# EAGLE board gameboyzero (EAGLE 8.4.1)

Size 458.11 x 664.34 mm. Coordinates in mm from the lower left corner, seen from the top.
Outline: 39.79,313.34 arc-90 38.79,314.34 38.79,406.34 arc-90 39.79,407.34
Outline: 108.79,313.34 arc90 109.79,314.34
Outline: 109.79,406.34 arc90 108.79,407.34
Outline: 108.79,407.34 39.79,407.34
Outline: 38.79,445.34 38.79,450.34 arc-90 39.79,451.34 108.79,451.34 arc-90 109.79,450.34
Outline: 38.79,445.34 38.79,408.34 arc90 39.79,407.34
Outline: 108.79,407.34 arc90 109.79,408.34
Outline: 109.79,445.34 38.79,445.34
Outline: 39.79,219.34 arc-90 38.79,220.34 38.79,258.34 66.79,258.34 66.79,262.34 81.79,262.34 81.79,273.34 66.79,273.34 66.79,276.34 100.79,276.34 100.79,286.34 38.79,286.34 38.79,312.34 arc-90 39.79,313.34
Outline: 108.79,219.34 arc90 109.79,220.34
Outline: 109.79,312.34 109.79,305.34 104.79,305.34 104.79,286.34 109.79,286.34
Outline: 109.79,312.34 arc90 108.79,313.34
Outline: 108.79,313.34 39.79,313.34
Outline: 38.79,70.34 38.79,88.34 100.79,88.34 100.79,98.34 38.79,98.34 38.79,124.34 arc-90 39.79,125.34
Outline: 109.79,61.34 109.79,124.34
Outline: 109.79,124.34 arc90 108.79,125.34
Outline: 108.79,125.34 39.79,125.34
Outline: 38.79,70.34 101.79,70.34 101.79,61.34
Outline: 109.79,7.34 109.79,61.34
Outline: 38.79,70.34 38.79,7.34 arc90 39.79,6.34 108.79,6.34 arc90 109.79,7.34
Outline: 109.79,61.34 46.79,61.34 46.79,70.34
Outline: 39.79,125.34 arc-90 38.79,126.34 38.79,164.34 66.79,164.34 66.79,168.34 81.79,168.34 81.79,179.34 66.79,179.34 66.79,182.34 100.79,182.34 100.79,192.34 38.79,192.34 38.79,218.34 arc-90 39.79,219.34
Outline: 108.79,125.34 arc90 109.79,126.34
Outline: 109.79,126.34 109.79,218.34
Outline: 109.79,218.34 arc90 108.79,219.34
Outline: 108.79,219.34 39.79,219.34
Outline: 109.79,406.34 109.79,314.34
Outline: 109.79,450.34 109.79,445.34
Outline: 109.79,445.34 109.79,408.34
Outline: 109.79,286.34 109.79,220.34
Outline: 109.79,88.34 109.79,33.34
Outline: 109.79,406.34 109.79,314.34
Outline: 109.79,314.34 arc90 110.79,313.34
Outline: 179.79,313.34 arc90 180.79,314.34
Outline: 180.79,406.34 arc90 179.79,407.34
Outline: 179.79,407.34 110.79,407.34
Outline: 110.79,407.34 arc90 109.79,406.34
Outline: 109.79,450.34 109.79,445.34
Outline: 109.79,445.34 109.79,408.34
Outline: 109.79,408.34 arc90 110.79,407.34
Outline: 179.79,407.34 arc90 180.79,408.34
Outline: 180.79,450.34 arc90 179.79,451.34 110.79,451.34 arc90 109.79,450.34
Outline: 180.79,445.34 109.79,445.34
Outline: 109.79,312.34 109.79,286.34
Outline: 109.79,220.34 109.79,258.34 137.79,258.34 137.79,262.34 152.79,262.34 152.79,273.34 137.79,273.34 137.79,276.34 171.79,276.34 171.79,286.34 109.79,286.34
Outline: 109.79,220.34 arc90 110.79,219.34
Outline: 179.79,219.34 arc90 180.79,220.34
Outline: 180.79,312.34 180.79,305.34 175.79,305.34 175.79,286.34 180.79,286.34
Outline: 180.79,312.34 arc90 179.79,313.34
Outline: 110.79,313.34 arc90 109.79,312.34
Outline: 179.79,313.34 110.79,313.34
Outline: 109.79,124.34 109.79,98.34 171.79,98.34 171.79,88.34 109.79,88.34
Outline: 109.79,88.34 109.79,70.34
Outline: 180.79,61.34 180.79,124.34
Outline: 180.79,124.34 arc90 179.79,125.34
Outline: 179.79,125.34 110.79,125.34
Outline: 110.79,125.34 arc90 109.79,124.34
Outline: 109.79,70.34 172.79,70.34 172.79,61.34
Outline: 180.79,7.34 180.79,61.34
Outline: 109.79,70.34 109.79,7.34
Outline: 109.79,7.34 arc90 110.79,6.34 179.79,6.34 arc90 180.79,7.34
Outline: 180.79,61.34 117.79,61.34 117.79,70.34
Outline: 109.79,218.34 109.79,192.34 171.79,192.34 171.79,182.34 137.79,182.34 137.79,179.34 152.79,179.34 152.79,168.34 137.79,168.34 137.79,164.34 109.79,164.34 109.79,126.34
Outline: 109.79,126.34 arc90 110.79,125.34
Outline: 179.79,125.34 arc90 180.79,126.34
Outline: 180.79,126.34 180.79,218.34
Outline: 180.79,218.34 arc90 179.79,219.34
Outline: 110.79,219.34 arc90 109.79,218.34
Outline: 179.79,219.34 110.79,219.34
Outline: 180.79,406.34 180.79,314.34
Outline: 180.79,450.34 180.79,445.34
Outline: 180.79,445.34 180.79,408.34
Outline: 180.79,286.34 180.79,220.34
Outline: 180.79,88.34 180.79,33.34
Outline: 180.79,406.34 180.79,314.34
Outline: 180.79,314.34 arc90 181.79,313.34
Outline: 250.79,313.34 arc90 251.79,314.34
Outline: 251.79,406.34 arc90 250.79,407.34
Outline: 250.79,407.34 181.79,407.34
Outline: 181.79,407.34 arc90 180.79,406.34
Outline: 180.79,450.34 180.79,445.34
Outline: 180.79,445.34 180.79,408.34
Outline: 180.79,408.34 arc90 181.79,407.34
Outline: 250.79,407.34 arc90 251.79,408.34
Outline: 251.79,450.34 arc90 250.79,451.34 181.79,451.34 arc90 180.79,450.34
Outline: 251.79,445.34 180.79,445.34
Outline: 180.79,312.34 180.79,286.34
Outline: 180.79,220.34 180.79,258.34 208.79,258.34 208.79,262.34 223.79,262.34 223.79,273.34 208.79,273.34 208.79,276.34 242.79,276.34 242.79,286.34 180.79,286.34
Outline: 180.79,220.34 arc90 181.79,219.34
Outline: 250.79,219.34 arc90 251.79,220.34
Outline: 251.79,312.34 251.79,305.34 246.79,305.34 246.79,286.34 251.79,286.34
Outline: 251.79,312.34 arc90 250.79,313.34
Outline: 181.79,313.34 arc90 180.79,312.34
Outline: 250.79,313.34 181.79,313.34
Outline: 180.79,124.34 180.79,98.34 242.79,98.34 242.79,88.34 180.79,88.34
Outline: 180.79,88.34 180.79,70.34
Outline: 251.79,61.34 251.79,124.34
Outline: 251.79,124.34 arc90 250.79,125.34
Outline: 250.79,125.34 181.79,125.34
Outline: 181.79,125.34 arc90 180.79,124.34
Outline: 180.79,70.34 243.79,70.34 243.79,61.34
Outline: 251.79,7.34 251.79,61.34
Outline: 180.79,70.34 180.79,7.34
Outline: 180.79,7.34 arc90 181.79,6.34 250.79,6.34 arc90 251.79,7.34
Outline: 251.79,61.34 188.79,61.34 188.79,70.34
Outline: 180.79,218.34 180.79,192.34 242.79,192.34 242.79,182.34 208.79,182.34 208.79,179.34 223.79,179.34 223.79,168.34 208.79,168.34 208.79,164.34 180.79,164.34 180.79,126.34
Outline: 180.79,126.34 arc90 181.79,125.34
Outline: 250.79,125.34 arc90 251.79,126.34
Outline: 251.79,126.34 251.79,218.34
Outline: 251.79,218.34 arc90 250.79,219.34
Outline: 181.79,219.34 arc90 180.79,218.34
Outline: 250.79,219.34 181.79,219.34
Outline: 251.79,406.34 251.79,314.34
Outline: 251.79,450.34 251.79,445.34
Outline: 251.79,445.34 251.79,408.34
Outline: 251.79,286.34 251.79,220.34
Outline: 251.79,88.34 251.79,33.34
Outline: 251.79,406.34 251.79,314.34
Outline: 251.79,314.34 arc90 252.79,313.34
Outline: 321.79,313.34 arc90 322.79,314.34
Outline: 322.79,406.34 arc90 321.79,407.34
Outline: 321.79,407.34 252.79,407.34
Outline: 252.79,407.34 arc90 251.79,406.34
Outline: 251.79,450.34 251.79,445.34
Outline: 251.79,445.34 251.79,408.34
Outline: 251.79,408.34 arc90 252.79,407.34
Outline: 321.79,407.34 arc90 322.79,408.34
Outline: 322.79,450.34 arc90 321.79,451.34 252.79,451.34 arc90 251.79,450.34
Outline: 322.79,445.34 251.79,445.34
Outline: 251.79,312.34 251.79,286.34
Outline: 251.79,220.34 251.79,258.34 279.79,258.34 279.79,262.34 294.79,262.34 294.79,273.34 279.79,273.34 279.79,276.34 313.79,276.34 313.79,286.34 251.79,286.34
Outline: 251.79,220.34 arc90 252.79,219.34
Outline: 321.79,219.34 arc90 322.79,220.34
Outline: 322.79,312.34 322.79,305.34 317.79,305.34 317.79,286.34 322.79,286.34
Outline: 322.79,312.34 arc90 321.79,313.34
Outline: 252.79,313.34 arc90 251.79,312.34
Outline: 321.79,313.34 252.79,313.34
Outline: 251.79,124.34 251.79,98.34 313.79,98.34 313.79,88.34 251.79,88.34
Outline: 251.79,88.34 251.79,70.34
Outline: 322.79,61.34 322.79,124.34
Outline: 322.79,124.34 arc90 321.79,125.34
Outline: 321.79,125.34 252.79,125.34
Outline: 252.79,125.34 arc90 251.79,124.34
Outline: 251.79,70.34 314.79,70.34 314.79,61.34
Outline: 322.79,7.34 322.79,61.34
Outline: 251.79,70.34 251.79,7.34
Outline: 251.79,7.34 arc90 252.79,6.34 321.79,6.34 arc90 322.79,7.34
Outline: 322.79,61.34 259.79,61.34 259.79,70.34
Outline: 251.79,218.34 251.79,192.34 313.79,192.34 313.79,182.34 279.79,182.34 279.79,179.34 294.79,179.34 294.79,168.34 279.79,168.34 279.79,164.34 251.79,164.34 251.79,126.34
Outline: 251.79,126.34 arc90 252.79,125.34
Outline: 321.79,125.34 arc90 322.79,126.34
Outline: 322.79,126.34 322.79,218.34
Outline: 322.79,218.34 arc90 321.79,219.34
Outline: 252.79,219.34 arc90 251.79,218.34
Outline: 321.79,219.34 252.79,219.34
Outline: 322.79,406.34 322.79,314.34
Outline: 322.79,450.34 322.79,445.34
Outline: 322.79,445.34 322.79,408.34
Outline: 322.79,286.34 322.79,220.34
Outline: 322.79,88.34 322.79,33.34
Outline: 322.79,406.34 322.79,314.34
Outline: 322.79,314.34 arc90 323.79,313.34
Outline: 392.79,313.34 arc90 393.79,314.34 393.79,406.34 arc90 392.79,407.34
Outline: 392.79,407.34 323.79,407.34
Outline: 323.79,407.34 arc90 322.79,406.34
Outline: 322.79,450.34 322.79,445.34
Outline: 322.79,445.34 322.79,408.34
Outline: 322.79,408.34 arc90 323.79,407.34
Outline: 392.79,407.34 arc90 393.79,408.34 393.79,445.34
Outline: 322.79,450.34 arc-90 323.79,451.34 392.79,451.34 arc-90 393.79,450.34 393.79,445.34
Outline: 393.79,445.34 322.79,445.34
Outline: 322.79,312.34 322.79,286.34
Outline: 322.79,220.34 322.79,258.34 350.79,258.34 350.79,262.34 365.79,262.34 365.79,273.34 350.79,273.34 350.79,276.34 384.79,276.34 384.79,286.34 322.79,286.34
Outline: 322.79,220.34 arc90 323.79,219.34
Outline: 392.79,219.34 arc90 393.79,220.34 393.79,286.34 388.79,286.34 388.79,305.34 393.79,305.34 393.79,312.34 arc90 392.79,313.34
Outline: 323.79,313.34 arc90 322.79,312.34
Outline: 392.79,313.34 323.79,313.34
Outline: 322.79,124.34 322.79,98.34 384.79,98.34 384.79,88.34 322.79,88.34
Outline: 322.79,88.34 322.79,70.34
Outline: 393.79,61.34 393.79,124.34 arc90 392.79,125.34
Outline: 392.79,125.34 323.79,125.34
Outline: 323.79,125.34 arc90 322.79,124.34
Outline: 322.79,70.34 385.79,70.34 385.79,61.34
Outline: 393.79,61.34 393.79,7.34 arc-90 392.79,6.34 323.79,6.34 arc-90 322.79,7.34
Outline: 322.79,70.34 322.79,7.34
Outline: 393.79,61.34 330.79,61.34 330.79,70.34
Outline: 322.79,218.34 322.79,192.34 384.79,192.34 384.79,182.34 350.79,182.34 350.79,179.34 365.79,179.34 365.79,168.34 350.79,168.34 350.79,164.34 322.79,164.34 322.79,126.34
Outline: 322.79,126.34 arc90 323.79,125.34
Outline: 392.79,125.34 arc90 393.79,126.34 393.79,218.34 arc90 392.79,219.34
Outline: 323.79,219.34 arc90 322.79,218.34
Outline: 392.79,219.34 323.79,219.34
Outline: 393.79,88.34 393.79,33.34
Outline: 393.86,380.34 456.86,380.34
Outline: 456.86,380.34 arc90 457.86,381.34 457.86,450.34 arc90 456.86,451.34 402.86,451.34 402.86,388.34 393.86,388.34
Outline: 456.86,380.34 402.86,380.34 402.86,317.34 393.86,317.34
Outline: 393.86,309.34 456.86,309.34 arc90 457.86,310.34 457.86,379.34 arc90 456.86,380.34
Outline: 394.11,238.34 457.11,238.34 arc90 458.11,239.34 458.11,308.34 arc90 457.11,309.34 403.11,309.34 403.11,246.34 394.11,246.34
Outline: 394.09,167.26 457.09,167.26
Outline: 457.09,167.26 arc90 458.09,168.26 458.09,237.26 arc90 457.09,238.26 431.09,238.26 431.09,176.26 421.09,176.26 421.09,238.26 403.09,238.26 403.09,175.26 394.09,175.26
Outline: 457.09,167.26 431.09,167.26 431.09,105.26 421.09,105.26 421.09,167.26 403.09,167.26 403.09,104.26 394.09,104.26
Outline: 394.09,96.26 457.09,96.26
Outline: 457.09,96.26 arc90 458.09,97.26 458.09,166.26 arc90 457.09,167.26
Outline: 457.09,96.26 431.09,96.26 431.09,34.26 421.09,34.26 421.09,96.26 403.09,96.26 403.09,33.26 394.09,33.26
Outline: 394.09,25.26 457.09,25.26 arc90 458.09,26.26 458.09,95.26 arc90 457.09,96.26
Outline: 176.81,452.34 arc-90 175.81,451.34 83.81,451.34 arc-90 82.81,452.34
Outline: 176.81,521.34 arc90 175.81,522.34
Outline: 83.81,522.34 arc90 82.81,521.34
Outline: 82.81,521.34 82.81,452.34
Outline: 44.81,451.34 39.81,451.34 arc-90 38.81,452.34 38.81,521.34 arc-90 39.81,522.34
Outline: 44.81,451.34 81.81,451.34 arc90 82.81,452.34
Outline: 82.81,521.34 arc90 81.81,522.34
Outline: 44.81,522.34 44.81,451.34
Outline: 270.81,452.34 arc-90 269.81,451.34 231.81,451.34 231.81,479.34 227.81,479.34 227.81,494.34 216.81,494.34 216.81,479.34 213.81,479.34 213.81,513.34 203.81,513.34 203.81,451.34 177.81,451.34 arc-90 176.81,452.34
Outline: 270.81,521.34 arc90 269.81,522.34
Outline: 177.81,522.34 184.81,522.34 184.81,517.34 203.81,517.34 203.81,522.34
Outline: 177.81,522.34 arc90 176.81,521.34
Outline: 176.81,521.34 176.81,452.34
Outline: 363.81,522.34 arc-90 364.81,521.34 364.81,452.34 arc-90 363.81,451.34 325.81,451.34 325.81,479.34 321.81,479.34 321.81,494.34 310.81,494.34 310.81,479.34 307.81,479.34 307.81,513.34 297.81,513.34 297.81,451.34 271.81,451.34 arc-90 270.81,452.34
Outline: 363.81,522.34 271.81,522.34
Outline: 271.81,522.34 arc90 270.81,521.34
Outline: 270.81,521.34 270.81,452.34
Outline: 83.81,522.34 175.81,522.34
Outline: 39.81,522.34 44.81,522.34
Outline: 44.81,522.34 81.81,522.34
Outline: 203.81,522.34 269.81,522.34
Outline: 83.81,522.34 175.81,522.34
Outline: 175.81,522.34 arc90 176.81,523.34
Outline: 176.81,592.34 arc90 175.81,593.34
Outline: 83.81,593.34 arc90 82.81,592.34
Outline: 82.81,592.34 82.81,523.34
Outline: 82.81,523.34 arc90 83.81,522.34
Outline: 39.81,522.34 44.81,522.34
Outline: 44.81,522.34 81.81,522.34
Outline: 81.81,522.34 arc90 82.81,523.34
Outline: 82.81,592.34 arc90 81.81,593.34
Outline: 39.81,593.34 arc90 38.81,592.34 38.81,523.34 arc90 39.81,522.34
Outline: 44.81,593.34 44.81,522.34
Outline: 177.81,522.34 203.81,522.34
Outline: 269.81,522.34 231.81,522.34 231.81,550.34 227.81,550.34 227.81,565.34 216.81,565.34 216.81,550.34 213.81,550.34 213.81,584.34 203.81,584.34 203.81,522.34
Outline: 269.81,522.34 arc90 270.81,523.34
Outline: 270.81,592.34 arc90 269.81,593.34
Outline: 177.81,593.34 184.81,593.34 184.81,588.34 203.81,588.34 203.81,593.34
Outline: 177.81,593.34 arc90 176.81,592.34
Outline: 176.81,523.34 arc90 177.81,522.34
Outline: 176.81,592.34 176.81,523.34
Outline: 271.81,522.34 297.81,522.34 297.81,584.34 307.81,584.34 307.81,550.34 310.81,550.34 310.81,565.34 321.81,565.34 321.81,550.34 325.81,550.34 325.81,522.34 363.81,522.34
Outline: 363.81,522.34 arc90 364.81,523.34 364.81,592.34 arc90 363.81,593.34
Outline: 363.81,593.34 271.81,593.34
Outline: 271.81,593.34 arc90 270.81,592.34
Outline: 270.81,523.34 arc90 271.81,522.34
Outline: 270.81,592.34 270.81,523.34
Outline: 83.81,593.34 175.81,593.34
Outline: 39.81,593.34 44.81,593.34
Outline: 44.81,593.34 81.81,593.34
Outline: 203.81,593.34 269.81,593.34
Outline: 83.81,593.34 175.81,593.34
Outline: 175.81,593.34 arc90 176.81,594.34
Outline: 176.81,663.34 arc90 175.81,664.34 83.81,664.34 arc90 82.81,663.34
Outline: 82.81,663.34 82.81,594.34
Outline: 82.81,594.34 arc90 83.81,593.34
Outline: 39.81,593.34 44.81,593.34
Outline: 44.81,593.34 81.81,593.34
Outline: 81.81,593.34 arc90 82.81,594.34
Outline: 82.81,663.34 arc90 81.81,664.34 44.81,664.34
Outline: 39.81,593.34 arc-90 38.81,594.34 38.81,663.34 arc-90 39.81,664.34 44.81,664.34
Outline: 44.81,664.34 44.81,593.34
Outline: 177.81,593.34 203.81,593.34
Outline: 269.81,593.34 231.81,593.34 231.81,621.34 227.81,621.34 227.81,636.34 216.81,636.34 216.81,621.34 213.81,621.34 213.81,655.34 203.81,655.34 203.81,593.34
Outline: 269.81,593.34 arc90 270.81,594.34
Outline: 270.81,663.34 arc90 269.81,664.34 203.81,664.34 203.81,659.34 184.81,659.34 184.81,664.34 177.81,664.34 arc90 176.81,663.34
Outline: 176.81,594.34 arc90 177.81,593.34
Outline: 176.81,663.34 176.81,594.34
Outline: 271.81,593.34 297.81,593.34 297.81,655.34 307.81,655.34 307.81,621.34 310.81,621.34 310.81,636.34 321.81,636.34 321.81,621.34 325.81,621.34 325.81,593.34 363.81,593.34
Outline: 363.81,593.34 arc90 364.81,594.34 364.81,663.34 arc90 363.81,664.34 271.81,664.34 arc90 270.81,663.34
Outline: 270.81,594.34 arc90 271.81,593.34
Outline: 270.81,663.34 270.81,594.34
Outline: 0,25.4 0,0 25.4,0 25.4,25.4 0,25.4
Outline: 85.45,342.54 74.25,346.62 arc90 73.61,346.32 69.16,334.1 arc90 69.46,333.46 79.69,329.74 75.79,319.04 88.48,314.42 arc90 89.12,314.72 91.88,322.29 103.08,318.22 arc90 103.72,318.52 108.17,330.73 arc90 107.87,331.37 98.11,334.92 arc-90 97.81,335.56 101.37,345.33 arc90 101.07,345.97 88.85,350.42 arc90 88.21,350.12 85.45,342.54
Outline: 54.14,342.49 65.94,330.69 arc-90 65.94,329.99 54.14,318.19 arc-90 53.44,318.19 41.64,329.99 arc-90 41.64,330.69 53.44,342.49 arc-90 54.14,342.49
Outline: 44.79,348.84 44.79,344.84 arc90 45.29,344.34 62.29,344.34 arc90 62.79,344.84 62.79,348.84 arc90 62.29,349.34 45.29,349.34 arc90 44.79,348.84
Outline: 85.45,436.54 74.25,440.62 arc90 73.61,440.32 69.16,428.1 arc90 69.46,427.46 79.69,423.74 75.79,413.04 88.48,408.42 arc90 89.12,408.72 91.88,416.29 103.08,412.22 arc90 103.72,412.52 108.17,424.73 arc90 107.87,425.37 98.11,428.92 arc-90 97.81,429.56 101.37,439.33 arc90 101.07,439.97 88.85,444.42 arc90 88.21,444.12 85.45,436.54
Outline: 54.14,436.49 65.94,424.69 arc-90 65.94,423.99 54.14,412.19 arc-90 53.44,412.19 41.64,423.99 arc-90 41.64,424.69 53.44,436.49 arc-90 54.14,436.49
Outline: 44.79,442.84 44.79,438.84 arc90 45.29,438.34 62.29,438.34 arc90 62.79,438.84 62.79,442.84 arc90 62.29,443.34 45.29,443.34 arc90 44.79,442.84
Outline: 75.72,230.68 80.72,241.42 arc90 80.51,241.99 arc-90 80.27,242.66 86.71,256.46 arc-90 87.38,256.7 99.16,251.21 arc-90 99.4,250.55 93.48,237.85 arc90 93.72,237.18 arc-90 93.93,236.61 88.41,224.76 arc-90 87.74,224.52 75.96,230.02 arc-90 75.72,230.68
Outline: 72.62,230.02 60.84,224.52 arc-90 60.18,224.76 54.65,236.61 arc-90 54.86,237.18 arc90 55.1,237.85 49.18,250.55 arc-90 49.42,251.21 61.2,256.7 arc-90 61.87,256.46 68.31,242.66 arc-90 68.07,241.99 arc90 67.86,241.42 72.86,230.68 arc-90 72.62,230.02
Outline: 66.79,74.34 81.79,74.34 81.79,85.34 66.79,85.34 66.79,74.34
Outline: 75.72,136.68 80.72,147.42 arc90 80.51,147.99 arc-90 80.27,148.66 86.71,162.46 arc-90 87.38,162.71 99.16,157.21 arc-90 99.4,156.55 93.48,143.85 arc90 93.72,143.18 arc-90 93.93,142.61 88.41,130.76 arc-90 87.74,130.52 75.96,136.02 arc-90 75.72,136.68
Outline: 72.62,136.02 60.84,130.52 arc-90 60.18,130.76 54.65,142.61 arc-90 54.86,143.18 arc90 55.1,143.85 49.18,156.55 arc-90 49.42,157.21 61.2,162.71 arc-90 61.87,162.46 68.31,148.66 arc-90 68.07,147.99 arc90 67.86,147.42 72.86,136.68 arc-90 72.62,136.02
Outline: 156.45,342.54 145.25,346.62 arc90 144.61,346.32 140.16,334.1 arc90 140.46,333.46 150.69,329.74 146.79,319.04 159.48,314.42 arc90 160.12,314.72 162.88,322.29 174.08,318.22 arc90 174.72,318.52 179.17,330.73 arc90 178.87,331.37 169.11,334.92 arc-90 168.81,335.56 172.37,345.33 arc90 172.07,345.97 159.85,350.42 arc90 159.21,350.12 156.45,342.54
Outline: 125.14,342.49 136.94,330.69 arc-90 136.94,329.99 125.14,318.19 arc-90 124.44,318.19 112.64,329.99 arc-90 112.64,330.69 124.44,342.49 arc-90 125.14,342.49
Outline: 115.79,348.84 115.79,344.84 arc90 116.29,344.34 133.29,344.34 arc90 133.79,344.84 133.79,348.84 arc90 133.29,349.34 116.29,349.34 arc90 115.79,348.84
Outline: 156.45,436.54 145.25,440.62 arc90 144.61,440.32 140.16,428.1 arc90 140.46,427.46 150.69,423.74 146.79,413.04 159.48,408.42 arc90 160.12,408.72 162.88,416.29 174.08,412.22 arc90 174.72,412.52 179.17,424.73 arc90 178.87,425.37 169.11,428.92 arc-90 168.81,429.56 172.37,439.33 arc90 172.07,439.97 159.85,444.42 arc90 159.21,444.12 156.45,436.54
Outline: 125.14,436.49 136.94,424.69 arc-90 136.94,423.99 125.14,412.19 arc-90 124.44,412.19 112.64,423.99 arc-90 112.64,424.69 124.44,436.49 arc-90 125.14,436.49
Outline: 115.79,442.84 115.79,438.84 arc90 116.29,438.34 133.29,438.34 arc90 133.79,438.84 133.79,442.84 arc90 133.29,443.34 116.29,443.34 arc90 115.79,442.84
Outline: 146.72,230.68 151.72,241.42 arc90 151.51,241.99 arc-90 151.27,242.66 157.71,256.46 arc-90 158.38,256.7 170.16,251.21 arc-90 170.4,250.55 164.48,237.85 arc90 164.72,237.18 arc-90 164.93,236.61 159.41,224.76 arc-90 158.74,224.52 146.96,230.02 arc-90 146.72,230.68
Outline: 143.62,230.02 131.84,224.52 arc-90 131.18,224.76 125.65,236.61 arc-90 125.86,237.18 arc90 126.1,237.85 120.18,250.55 arc-90 120.42,251.21 132.2,256.7 arc-90 132.87,256.46 139.31,242.66 arc-90 139.07,241.99 arc90 138.86,241.42 143.86,230.68 arc-90 143.62,230.02
Outline: 137.79,74.34 152.79,74.34 152.79,85.34 137.79,85.34 137.79,74.34
Outline: 146.72,136.68 151.72,147.42 arc90 151.51,147.99 arc-90 151.27,148.66 157.71,162.46 arc-90 158.38,162.71 170.16,157.21 arc-90 170.4,156.55 164.48,143.85 arc90 164.72,143.18 arc-90 164.93,142.61 159.41,130.76 arc-90 158.74,130.52 146.96,136.02 arc-90 146.72,136.68
Outline: 143.62,136.02 131.84,130.52 arc-90 131.18,130.76 125.65,142.61 arc-90 125.86,143.18 arc90 126.1,143.85 120.18,156.55 arc-90 120.42,157.21 132.2,162.71 arc-90 132.87,162.46 139.31,148.66 arc-90 139.07,147.99 arc90 138.86,147.42 143.86,136.68 arc-90 143.62,136.02
Outline: 227.45,342.54 216.25,346.62 arc90 215.61,346.32 211.16,334.1 arc90 211.46,333.46 221.69,329.74 217.79,319.04 230.48,314.42 arc90 231.12,314.72 233.88,322.29 245.08,318.22 arc90 245.72,318.52 250.17,330.73 arc90 249.87,331.37 240.11,334.92 arc-90 239.81,335.56 243.37,345.33 arc90 243.07,345.97 230.85,350.42 arc90 230.21,350.12 227.45,342.54
Outline: 196.14,342.49 207.94,330.69 arc-90 207.94,329.99 196.14,318.19 arc-90 195.44,318.19 183.64,329.99 arc-90 183.64,330.69 195.44,342.49 arc-90 196.14,342.49
Outline: 186.79,348.84 186.79,344.84 arc90 187.29,344.34 204.29,344.34 arc90 204.79,344.84 204.79,348.84 arc90 204.29,349.34 187.29,349.34 arc90 186.79,348.84
Outline: 227.45,436.54 216.25,440.62 arc90 215.61,440.32 211.16,428.1 arc90 211.46,427.46 221.69,423.74 217.79,413.04 230.48,408.42 arc90 231.12,408.72 233.88,416.29 245.08,412.22 arc90 245.72,412.52 250.17,424.73 arc90 249.87,425.37 240.11,428.92 arc-90 239.81,429.56 243.37,439.33 arc90 243.07,439.97 230.85,444.42 arc90 230.21,444.12 227.45,436.54
Outline: 196.14,436.49 207.94,424.69 arc-90 207.94,423.99 196.14,412.19 arc-90 195.44,412.19 183.64,423.99 arc-90 183.64,424.69 195.44,436.49 arc-90 196.14,436.49
Outline: 186.79,442.84 186.79,438.84 arc90 187.29,438.34 204.29,438.34 arc90 204.79,438.84 204.79,442.84 arc90 204.29,443.34 187.29,443.34 arc90 186.79,442.84
Outline: 217.72,230.68 222.72,241.42 arc90 222.51,241.99 arc-90 222.27,242.66 228.71,256.46 arc-90 229.38,256.7 241.16,251.21 arc-90 241.4,250.55 235.48,237.85 arc90 235.72,237.18 arc-90 235.93,236.61 230.41,224.76 arc-90 229.74,224.52 217.96,230.02 arc-90 217.72,230.68
Outline: 214.62,230.02 202.84,224.52 arc-90 202.18,224.76 196.65,236.61 arc-90 196.86,237.18 arc90 197.1,237.85 191.18,250.55 arc-90 191.42,251.21 203.2,256.7 arc-90 203.87,256.46 210.31,242.66 arc-90 210.07,241.99 arc90 209.86,241.42 214.86,230.68 arc-90 214.62,230.02
Outline: 208.79,74.34 223.79,74.34 223.79,85.34 208.79,85.34 208.79,74.34
Outline: 217.72,136.68 222.72,147.42 arc90 222.51,147.99 arc-90 222.27,148.66 228.71,162.46 arc-90 229.38,162.71 241.16,157.21 arc-90 241.4,156.55 235.48,143.85 arc90 235.72,143.18 arc-90 235.93,142.61 230.41,130.76 arc-90 229.74,130.52 217.96,136.02 arc-90 217.72,136.68
Outline: 214.62,136.02 202.84,130.52 arc-90 202.18,130.76 196.65,142.61 arc-90 196.86,143.18 arc90 197.1,143.85 191.18,156.55 arc-90 191.42,157.21 203.2,162.71 arc-90 203.87,162.46 210.31,148.66 arc-90 210.07,147.99 arc90 209.86,147.42 214.86,136.68 arc-90 214.62,136.02
Outline: 298.45,342.54 287.25,346.62 arc90 286.61,346.32 282.16,334.1 arc90 282.46,333.46 292.69,329.74 288.79,319.04 301.48,314.42 arc90 302.12,314.72 304.88,322.29 316.08,318.22 arc90 316.72,318.52 321.16,330.73 arc90 320.87,331.37 311.11,334.92 arc-90 310.81,335.56 314.37,345.33 arc90 314.07,345.97 301.85,350.42 arc90 301.21,350.12 298.45,342.54
Outline: 267.14,342.49 278.94,330.69 arc-90 278.94,329.99 267.14,318.19 arc-90 266.44,318.19 254.64,329.99 arc-90 254.64,330.69 266.44,342.49 arc-90 267.14,342.49
Outline: 257.79,348.84 257.79,344.84 arc90 258.29,344.34 275.29,344.34 arc90 275.79,344.84 275.79,348.84 arc90 275.29,349.34 258.29,349.34 arc90 257.79,348.84
Outline: 298.45,436.54 287.25,440.62 arc90 286.61,440.32 282.16,428.1 arc90 282.46,427.46 292.69,423.74 288.79,413.04 301.48,408.42 arc90 302.12,408.72 304.88,416.29 316.08,412.22 arc90 316.72,412.52 321.16,424.73 arc90 320.87,425.37 311.11,428.92 arc-90 310.81,429.56 314.37,439.33 arc90 314.07,439.97 301.85,444.42 arc90 301.21,444.12 298.45,436.54
Outline: 267.14,436.49 278.94,424.69 arc-90 278.94,423.99 267.14,412.19 arc-90 266.44,412.19 254.64,423.99 arc-90 254.64,424.69 266.44,436.49 arc-90 267.14,436.49
Outline: 257.79,442.84 257.79,438.84 arc90 258.29,438.34 275.29,438.34 arc90 275.79,438.84 275.79,442.84 arc90 275.29,443.34 258.29,443.34 arc90 257.79,442.84
Outline: 288.72,230.68 293.72,241.42 arc90 293.51,241.99 arc-90 293.27,242.66 299.71,256.46 arc-90 300.38,256.7 312.16,251.21 arc-90 312.4,250.55 306.48,237.85 arc90 306.72,237.18 arc-90 306.93,236.61 301.4,224.76 arc-90 300.74,224.52 288.96,230.02 arc-90 288.72,230.68
Outline: 285.62,230.02 273.84,224.52 arc-90 273.18,224.76 267.65,236.61 arc-90 267.86,237.18 arc90 268.1,237.85 262.18,250.55 arc-90 262.42,251.21 274.2,256.7 arc-90 274.87,256.46 281.31,242.66 arc-90 281.07,241.99 arc90 280.86,241.42 285.86,230.68 arc-90 285.62,230.02
Outline: 279.79,74.34 294.79,74.34 294.79,85.34 279.79,85.34 279.79,74.34
Outline: 288.72,136.68 293.72,147.42 arc90 293.51,147.99 arc-90 293.27,148.66 299.71,162.46 arc-90 300.38,162.71 312.16,157.21 arc-90 312.4,156.55 306.48,143.85 arc90 306.72,143.18 arc-90 306.93,142.61 301.4,130.76 arc-90 300.74,130.52 288.96,136.02 arc-90 288.72,136.68
Outline: 285.62,136.02 273.84,130.52 arc-90 273.18,130.76 267.65,142.61 arc-90 267.86,143.18 arc90 268.1,143.85 262.18,156.55 arc-90 262.42,157.21 274.2,162.71 arc-90 274.87,162.46 281.31,148.66 arc-90 281.07,147.99 arc90 280.86,147.42 285.86,136.68 arc-90 285.62,136.02
Outline: 369.45,342.54 358.25,346.62 arc90 357.61,346.32 353.16,334.1 arc90 353.46,333.46 363.69,329.74 359.79,319.04 372.48,314.42 arc90 373.12,314.72 375.88,322.29 387.08,318.22 arc90 387.72,318.52 392.16,330.73 arc90 391.87,331.37 382.11,334.92 arc-90 381.81,335.56 385.37,345.33 arc90 385.07,345.97 372.85,350.42 arc90 372.21,350.12 369.45,342.54
Outline: 338.14,342.49 349.94,330.69 arc-90 349.94,329.99 338.14,318.19 arc-90 337.44,318.19 325.64,329.99 arc-90 325.64,330.69 337.44,342.49 arc-90 338.14,342.49
Outline: 328.79,348.84 328.79,344.84 arc90 329.29,344.34 346.29,344.34 arc90 346.79,344.84 346.79,348.84 arc90 346.29,349.34 329.29,349.34 arc90 328.79,348.84
Outline: 369.45,436.54 358.25,440.62 arc90 357.61,440.32 353.16,428.1 arc90 353.46,427.46 363.69,423.74 359.79,413.04 372.48,408.42 arc90 373.12,408.72 375.88,416.29 387.08,412.22 arc90 387.72,412.52 392.16,424.73 arc90 391.87,425.37 382.11,428.92 arc-90 381.81,429.56 385.37,439.33 arc90 385.07,439.97 372.85,444.42 arc90 372.21,444.12 369.45,436.54
Outline: 338.14,436.49 349.94,424.69 arc-90 349.94,423.99 338.14,412.19 arc-90 337.44,412.19 325.64,423.99 arc-90 325.64,424.69 337.44,436.49 arc-90 338.14,436.49
Outline: 328.79,442.84 328.79,438.84 arc90 329.29,438.34 346.29,438.34 arc90 346.79,438.84 346.79,442.84 arc90 346.29,443.34 329.29,443.34 arc90 328.79,442.84
Outline: 359.72,230.68 364.72,241.42 arc90 364.51,241.99 arc-90 364.27,242.66 370.71,256.46 arc-90 371.38,256.7 383.16,251.21 arc-90 383.4,250.55 377.48,237.85 arc90 377.72,237.18 arc-90 377.93,236.61 372.4,224.76 arc-90 371.74,224.52 359.96,230.02 arc-90 359.72,230.68
Outline: 356.62,230.02 344.84,224.52 arc-90 344.18,224.76 338.65,236.61 arc-90 338.86,237.18 arc90 339.1,237.85 333.18,250.55 arc-90 333.42,251.21 345.2,256.7 arc-90 345.87,256.46 352.31,242.66 arc-90 352.07,241.99 arc90 351.86,241.42 356.86,230.68 arc-90 356.62,230.02
Outline: 350.79,74.34 365.79,74.34 365.79,85.34 350.79,85.34 350.79,74.34
Outline: 359.72,136.68 364.72,147.42 arc90 364.51,147.99 arc-90 364.27,148.66 370.71,162.46 arc-90 371.38,162.71 383.16,157.21 arc-90 383.4,156.55 377.48,143.85 arc90 377.72,143.18 arc-90 377.93,142.61 372.4,130.76 arc-90 371.74,130.52 359.96,136.02 arc-90 359.72,136.68
Outline: 356.62,136.02 344.84,130.52 arc-90 344.18,130.76 338.65,142.61 arc-90 338.86,143.18 arc90 339.1,143.85 333.18,156.55 arc-90 333.42,157.21 345.2,162.71 arc-90 345.87,162.46 352.31,148.66 arc-90 352.07,147.99 arc90 351.86,147.42 356.86,136.68 arc-90 356.62,136.02
Outline: 407.09,210.26 407.09,195.26 418.09,195.26 418.09,210.26 407.09,210.26
Outline: 407.09,139.26 407.09,124.26 418.09,124.26 418.09,139.26 407.09,139.26
Outline: 407.09,68.26 407.09,53.26 418.09,53.26 418.09,68.26 407.09,68.26
Outline: 147.61,498 143.53,486.8 arc90 143.83,486.16 156.05,481.71 arc90 156.69,482.01 160.41,492.24 171.12,488.34 175.73,501.03 arc90 175.43,501.67 167.86,504.43 171.93,515.63 arc90 171.63,516.27 159.42,520.72 arc90 158.78,520.42 155.23,510.66 arc-90 154.59,510.36 144.82,513.91 arc90 144.18,513.62 139.73,501.4 arc90 140.03,500.76 147.61,498
Outline: 147.66,466.69 159.46,478.49 arc-90 160.16,478.49 171.96,466.69 arc-90 171.96,465.99 160.16,454.19 arc-90 159.46,454.19 147.66,465.99 arc-90 147.66,466.69
Outline: 141.31,457.34 145.31,457.34 arc90 145.81,457.84 145.81,474.84 arc90 145.31,475.34 141.31,475.34 arc90 140.81,474.84 140.81,457.84 arc90 141.31,457.34
Outline: 53.61,498 49.53,486.8 arc90 49.83,486.16 62.05,481.71 arc90 62.69,482.01 66.41,492.24 77.12,488.34 81.73,501.03 arc90 81.43,501.67 73.86,504.43 77.93,515.63 arc90 77.63,516.27 65.42,520.72 arc90 64.78,520.42 61.23,510.66 arc-90 60.59,510.36 50.82,513.91 arc90 50.18,513.62 45.73,501.4 arc90 46.03,500.76 53.61,498
Outline: 53.66,466.69 65.46,478.49 arc-90 66.16,478.49 77.96,466.69 arc-90 77.96,465.99 66.16,454.19 arc-90 65.46,454.19 53.66,465.99 arc-90 53.66,466.69
Outline: 47.31,457.34 51.31,457.34 arc90 51.81,457.84 51.81,474.84 arc90 51.31,475.34 47.31,475.34 arc90 46.81,474.84 46.81,457.84 arc90 47.31,457.34
Outline: 259.47,488.27 248.73,493.27 arc90 248.16,493.06 arc-90 247.49,492.82 233.69,499.26 arc-90 233.44,499.93 238.94,511.71 arc-90 239.6,511.95 252.3,506.03 arc90 252.97,506.27 arc-90 253.54,506.48 265.38,500.95 arc-90 265.63,500.29 260.13,488.51 arc-90 259.47,488.27
Outline: 260.13,485.17 265.63,473.39 arc-90 265.38,472.73 253.54,467.2 arc-90 252.97,467.41 arc90 252.3,467.65 239.6,461.73 arc-90 238.94,461.97 233.44,473.75 arc-90 233.69,474.42 247.49,480.86 arc-90 248.16,480.62 arc90 248.73,480.41 259.47,485.41 arc-90 260.13,485.17
Outline: 353.47,488.27 342.73,493.27 arc90 342.16,493.06 arc-90 341.49,492.82 327.69,499.26 arc-90 327.44,499.93 332.94,511.71 arc-90 333.6,511.95 346.3,506.03 arc90 346.97,506.27 arc-90 347.54,506.48 359.38,500.95 arc-90 359.63,500.29 354.13,488.51 arc-90 353.47,488.27
Outline: 354.13,485.17 359.63,473.39 arc-90 359.38,472.73 347.54,467.2 arc-90 346.97,467.41 arc90 346.3,467.65 333.6,461.73 arc-90 332.94,461.97 327.44,473.75 arc-90 327.69,474.42 341.49,480.86 arc-90 342.16,480.62 arc90 342.73,480.41 353.47,485.41 arc-90 354.13,485.17
Outline: 147.61,569 143.53,557.8 arc90 143.83,557.16 156.05,552.71 arc90 156.69,553.01 160.41,563.24 171.12,559.34 175.73,572.03 arc90 175.43,572.67 167.86,575.43 171.93,586.63 arc90 171.63,587.27 159.42,591.72 arc90 158.78,591.42 155.23,581.66 arc-90 154.59,581.36 144.82,584.91 arc90 144.18,584.62 139.73,572.4 arc90 140.03,571.76 147.61,569
Outline: 147.66,537.69 159.46,549.49 arc-90 160.16,549.49 171.96,537.69 arc-90 171.96,536.99 160.16,525.19 arc-90 159.46,525.19 147.66,536.99 arc-90 147.66,537.69
Outline: 141.31,528.34 145.31,528.34 arc90 145.81,528.84 145.81,545.84 arc90 145.31,546.34 141.31,546.34 arc90 140.81,545.84 140.81,528.84 arc90 141.31,528.34
Outline: 53.61,569 49.53,557.8 arc90 49.83,557.16 62.05,552.71 arc90 62.69,553.01 66.41,563.24 77.12,559.34 81.73,572.03 arc90 81.43,572.67 73.86,575.43 77.93,586.63 arc90 77.63,587.27 65.42,591.72 arc90 64.78,591.42 61.23,581.66 arc-90 60.59,581.36 50.82,584.91 arc90 50.18,584.62 45.73,572.4 arc90 46.03,571.76 53.61,569
Outline: 53.66,537.69 65.46,549.49 arc-90 66.16,549.49 77.96,537.69 arc-90 77.96,536.99 66.16,525.19 arc-90 65.46,525.19 53.66,536.99 arc-90 53.66,537.69
Outline: 47.31,528.34 51.31,528.34 arc90 51.81,528.84 51.81,545.84 arc90 51.31,546.34 47.31,546.34 arc90 46.81,545.84 46.81,528.84 arc90 47.31,528.34
Outline: 259.47,559.27 248.73,564.27 arc90 248.16,564.06 arc-90 247.49,563.82 233.69,570.26 arc-90 233.44,570.92 238.94,582.71 arc-90 239.6,582.95 252.3,577.03 arc90 252.97,577.27 arc-90 253.54,577.48 265.38,571.96 arc-90 265.63,571.29 260.13,559.51 arc-90 259.47,559.27
Outline: 260.13,556.17 265.63,544.39 arc-90 265.38,543.73 253.54,538.2 arc-90 252.97,538.41 arc90 252.3,538.65 239.6,532.73 arc-90 238.94,532.97 233.44,544.75 arc-90 233.69,545.42 247.49,551.86 arc-90 248.16,551.62 arc90 248.73,551.41 259.47,556.41 arc-90 260.13,556.17
Outline: 353.47,559.27 342.73,564.27 arc90 342.16,564.06 arc-90 341.49,563.82 327.69,570.26 arc-90 327.44,570.92 332.94,582.71 arc-90 333.6,582.95 346.3,577.03 arc90 346.97,577.27 arc-90 347.54,577.48 359.38,571.96 arc-90 359.63,571.29 354.13,559.51 arc-90 353.47,559.27
Outline: 354.13,556.17 359.63,544.39 arc-90 359.38,543.73 347.54,538.2 arc-90 346.97,538.41 arc90 346.3,538.65 333.6,532.73 arc-90 332.94,532.97 327.44,544.75 arc-90 327.69,545.42 341.49,551.86 arc-90 342.16,551.62 arc90 342.73,551.41 353.47,556.41 arc-90 354.13,556.17
Outline: 147.61,640 143.53,628.8 arc90 143.83,628.16 156.05,623.71 arc90 156.69,624.01 160.41,634.24 171.12,630.34 175.73,643.03 arc90 175.43,643.67 167.86,646.43 171.93,657.63 arc90 171.63,658.27 159.42,662.72 arc90 158.78,662.42 155.23,652.66 arc-90 154.59,652.36 144.82,655.91 arc90 144.18,655.62 139.73,643.4 arc90 140.03,642.76 147.61,640
Outline: 147.66,608.69 159.46,620.49 arc-90 160.16,620.49 171.96,608.69 arc-90 171.96,607.99 160.16,596.19 arc-90 159.46,596.19 147.66,607.99 arc-90 147.66,608.69
Outline: 141.31,599.34 145.31,599.34 arc90 145.81,599.84 145.81,616.84 arc90 145.31,617.34 141.31,617.34 arc90 140.81,616.84 140.81,599.84 arc90 141.31,599.34
Outline: 53.61,640 49.53,628.8 arc90 49.83,628.16 62.05,623.71 arc90 62.69,624.01 66.41,634.24 77.12,630.34 81.73,643.03 arc90 81.43,643.67 73.86,646.43 77.93,657.63 arc90 77.63,658.27 65.42,662.72 arc90 64.78,662.42 61.23,652.66 arc-90 60.59,652.36 50.82,655.91 arc90 50.18,655.62 45.73,643.4 arc90 46.03,642.76 53.61,640
Outline: 53.66,608.69 65.46,620.49 arc-90 66.16,620.49 77.96,608.69 arc-90 77.96,607.99 66.16,596.19 arc-90 65.46,596.19 53.66,607.99 arc-90 53.66,608.69
Outline: 47.31,599.34 51.31,599.34 arc90 51.81,599.84 51.81,616.84 arc90 51.31,617.34 47.31,617.34 arc90 46.81,616.84 46.81,599.84 arc90 47.31,599.34
Outline: 259.47,630.27 248.73,635.27 arc90 248.16,635.06 arc-90 247.49,634.82 233.69,641.26 arc-90 233.44,641.92 238.94,653.71 arc-90 239.6,653.95 252.3,648.03 arc90 252.97,648.27 arc-90 253.54,648.48 265.38,642.96 arc-90 265.63,642.29 260.13,630.51 arc-90 259.47,630.27
Outline: 260.13,627.17 265.63,615.39 arc-90 265.38,614.73 253.54,609.2 arc-90 252.97,609.41 arc90 252.3,609.65 239.6,603.73 arc-90 238.94,603.97 233.44,615.75 arc-90 233.69,616.42 247.49,622.86 arc-90 248.16,622.62 arc90 248.73,622.41 259.47,627.41 arc-90 260.13,627.17
Outline: 353.47,630.27 342.73,635.27 arc90 342.16,635.06 arc-90 341.49,634.82 327.69,641.26 arc-90 327.44,641.92 332.94,653.71 arc-90 333.6,653.95 346.3,648.03 arc90 346.97,648.27 arc-90 347.54,648.48 359.38,642.96 arc-90 359.63,642.29 354.13,630.51 arc-90 353.47,630.27
Outline: 354.13,627.17 359.63,615.39 arc-90 359.38,614.73 347.54,609.2 arc-90 346.97,609.41 arc90 346.3,609.65 333.6,603.73 arc-90 332.94,603.97 327.44,615.75 arc-90 327.69,616.42 341.49,622.86 arc-90 342.16,622.62 arc90 342.73,622.41 353.47,627.41 arc-90 354.13,627.17
Copper layers (1*16): Top 0.035mm / dielectric 1.5mm / Bottom 0.035mm
Design rules "default": minimum track width 6mil, minimum drill 0.35mm, track to track 6mil, track to pad 6mil, pad to pad 6mil, via to via 6mil, smd to smd 6mil, copper to edge 40mil, drill to drill 6mil, minimum pad ring 10mil, minimum via ring 8mil, stop-mask expansion 4mil, vias tented up to drill 0mil, thermal gap 10mil

## Footprints (pad centres in the part's own frame; a part is rotated, then mirrored left to right if it is on the bottom)
2,8 = hole 2.8: 0,0

## Placement (x,y rotation side)
H16  MOUNT-HOLE2.8  [2,8]  172.81,455.34 90 top
H17  MOUNT-HOLE2.8  [2,8]  172.81,518.34 90 top
H18  MOUNT-HOLE2.8  [2,8]  142.81,518.34 90 top
H19  MOUNT-HOLE2.8  [2,8]  85.81,455.34 90 top
H20  MOUNT-HOLE2.8  [2,8]  85.81,518.34 90 top
H21  MOUNT-HOLE2.8  [2,8]  78.81,455.34 90 top
H22  MOUNT-HOLE2.8  [2,8]  42.79,317.34 0 top
H23  MOUNT-HOLE2.8  [2,8]  105.79,317.34 0 top
H24  MOUNT-HOLE2.8  [2,8]  105.79,347.34 0 top
H25  MOUNT-HOLE2.8  [2,8]  42.79,404.34 0 top
H26  MOUNT-HOLE2.8  [2,8]  105.79,404.34 0 top
H32  MOUNT-HOLE2.8  [2,8]  42.79,411.34 0 top
H33  MOUNT-HOLE2.8  [2,8]  105.79,411.34 0 top
H34  MOUNT-HOLE2.8  [2,8]  105.79,441.34 0 top
H35  MOUNT-HOLE2.8  [2,8]  42.79,448.34 0 top
H36  MOUNT-HOLE2.8  [2,8]  105.79,448.34 0 top
H37  MOUNT-HOLE2.8  [2,8]  42.79,223.34 0 top
H38  MOUNT-HOLE2.8  [2,8]  105.79,223.34 0 top
H39  MOUNT-HOLE2.8  [2,8]  105.79,253.34 0 top
H40  MOUNT-HOLE2.8  [2,8]  42.79,310.34 0 top
H41  MOUNT-HOLE2.8  [2,8]  105.79,310.34 0 top
H42  MOUNT-HOLE2.8  [2,8]  105.79,65.34 0 top
H43  MOUNT-HOLE2.8  [2,8]  42.79,122.34 0 top
H44  MOUNT-HOLE2.8  [2,8]  105.79,122.34 0 top
H45  MOUNT-HOLE2.8  [2,8]  42.79,66.34 180 top
H46  MOUNT-HOLE2.8  [2,8]  105.79,9.34 180 top
H47  MOUNT-HOLE2.8  [2,8]  42.79,9.34 180 top
H48  MOUNT-HOLE2.8  [2,8]  42.79,129.34 0 top
H49  MOUNT-HOLE2.8  [2,8]  105.79,129.34 0 top
H50  MOUNT-HOLE2.8  [2,8]  105.79,159.34 0 top
H51  MOUNT-HOLE2.8  [2,8]  42.79,216.34 0 top
H52  MOUNT-HOLE2.8  [2,8]  105.79,216.34 0 top
H53  MOUNT-HOLE2.8  [2,8]  113.79,317.34 0 top
H54  MOUNT-HOLE2.8  [2,8]  176.79,317.34 0 top
H55  MOUNT-HOLE2.8  [2,8]  176.79,347.34 0 top
H56  MOUNT-HOLE2.8  [2,8]  113.79,404.34 0 top
H57  MOUNT-HOLE2.8  [2,8]  176.79,404.34 0 top
H58  MOUNT-HOLE2.8  [2,8]  113.79,411.34 0 top
H59  MOUNT-HOLE2.8  [2,8]  176.79,411.34 0 top
H60  MOUNT-HOLE2.8  [2,8]  176.79,441.34 0 top
H61  MOUNT-HOLE2.8  [2,8]  113.79,448.34 0 top
H62  MOUNT-HOLE2.8  [2,8]  176.79,448.34 0 top
H63  MOUNT-HOLE2.8  [2,8]  113.79,223.34 0 top
H64  MOUNT-HOLE2.8  [2,8]  176.79,223.34 0 top
H65  MOUNT-HOLE2.8  [2,8]  176.79,253.34 0 top
H66  MOUNT-HOLE2.8  [2,8]  113.79,310.34 0 top
H67  MOUNT-HOLE2.8  [2,8]  176.79,310.34 0 top
H68  MOUNT-HOLE2.8  [2,8]  176.79,65.34 0 top
H69  MOUNT-HOLE2.8  [2,8]  113.79,122.34 0 top
H70  MOUNT-HOLE2.8  [2,8]  176.79,122.34 0 top
H71  MOUNT-HOLE2.8  [2,8]  113.79,66.34 180 top
H72  MOUNT-HOLE2.8  [2,8]  176.79,9.34 180 top
H73  MOUNT-HOLE2.8  [2,8]  113.79,9.34 180 top
H74  MOUNT-HOLE2.8  [2,8]  113.79,129.34 0 top
H75  MOUNT-HOLE2.8  [2,8]  176.79,129.34 0 top
H76  MOUNT-HOLE2.8  [2,8]  176.79,159.34 0 top
H77  MOUNT-HOLE2.8  [2,8]  113.79,216.34 0 top
H78  MOUNT-HOLE2.8  [2,8]  176.79,216.34 0 top
H79  MOUNT-HOLE2.8  [2,8]  184.79,317.34 0 top
H80  MOUNT-HOLE2.8  [2,8]  247.79,317.34 0 top
H81  MOUNT-HOLE2.8  [2,8]  247.79,347.34 0 top
H82  MOUNT-HOLE2.8  [2,8]  184.79,404.34 0 top
H83  MOUNT-HOLE2.8  [2,8]  247.79,404.34 0 top
H84  MOUNT-HOLE2.8  [2,8]  184.79,411.34 0 top
H85  MOUNT-HOLE2.8  [2,8]  247.79,411.34 0 top
H86  MOUNT-HOLE2.8  [2,8]  247.79,441.34 0 top
H87  MOUNT-HOLE2.8  [2,8]  184.79,448.34 0 top
H88  MOUNT-HOLE2.8  [2,8]  247.79,448.34 0 top
H89  MOUNT-HOLE2.8  [2,8]  184.79,223.34 0 top
H90  MOUNT-HOLE2.8  [2,8]  247.79,223.34 0 top
H91  MOUNT-HOLE2.8  [2,8]  247.79,253.34 0 top
H92  MOUNT-HOLE2.8  [2,8]  184.79,310.34 0 top
H93  MOUNT-HOLE2.8  [2,8]  247.79,310.34 0 top
H94  MOUNT-HOLE2.8  [2,8]  247.79,65.34 0 top
H95  MOUNT-HOLE2.8  [2,8]  184.79,122.34 0 top
H96  MOUNT-HOLE2.8  [2,8]  247.79,122.34 0 top
H97  MOUNT-HOLE2.8  [2,8]  184.79,66.34 180 top
H98  MOUNT-HOLE2.8  [2,8]  247.79,9.34 180 top
H99  MOUNT-HOLE2.8  [2,8]  184.79,9.34 180 top
H100  MOUNT-HOLE2.8  [2,8]  184.79,129.34 0 top
H101  MOUNT-HOLE2.8  [2,8]  247.79,129.34 0 top
H102  MOUNT-HOLE2.8  [2,8]  247.79,159.34 0 top
H103  MOUNT-HOLE2.8  [2,8]  184.79,216.34 0 top
H104  MOUNT-HOLE2.8  [2,8]  247.79,216.34 0 top
H105  MOUNT-HOLE2.8  [2,8]  255.79,317.34 0 top
H106  MOUNT-HOLE2.8  [2,8]  318.79,317.34 0 top
H107  MOUNT-HOLE2.8  [2,8]  318.79,347.34 0 top
H108  MOUNT-HOLE2.8  [2,8]  255.79,404.34 0 top
H109  MOUNT-HOLE2.8  [2,8]  318.79,404.34 0 top
H110  MOUNT-HOLE2.8  [2,8]  255.79,411.34 0 top
H111  MOUNT-HOLE2.8  [2,8]  318.79,411.34 0 top
H112  MOUNT-HOLE2.8  [2,8]  318.79,441.34 0 top
H113  MOUNT-HOLE2.8  [2,8]  255.79,448.34 0 top
H114  MOUNT-HOLE2.8  [2,8]  318.79,448.34 0 top
H115  MOUNT-HOLE2.8  [2,8]  255.79,223.34 0 top
H116  MOUNT-HOLE2.8  [2,8]  318.79,223.34 0 top
H117  MOUNT-HOLE2.8  [2,8]  318.79,253.34 0 top
H118  MOUNT-HOLE2.8  [2,8]  255.79,310.34 0 top
H119  MOUNT-HOLE2.8  [2,8]  318.79,310.34 0 top
H120  MOUNT-HOLE2.8  [2,8]  318.79,65.34 0 top
H121  MOUNT-HOLE2.8  [2,8]  255.79,122.34 0 top
H122  MOUNT-HOLE2.8  [2,8]  318.79,122.34 0 top
H123  MOUNT-HOLE2.8  [2,8]  255.79,66.34 180 top
H124  MOUNT-HOLE2.8  [2,8]  318.79,9.34 180 top
H125  MOUNT-HOLE2.8  [2,8]  255.79,9.34 180 top
H126  MOUNT-HOLE2.8  [2,8]  255.79,129.34 0 top
H127  MOUNT-HOLE2.8  [2,8]  318.79,129.34 0 top
H128  MOUNT-HOLE2.8  [2,8]  318.79,159.34 0 top
H129  MOUNT-HOLE2.8  [2,8]  255.79,216.34 0 top
H130  MOUNT-HOLE2.8  [2,8]  318.79,216.34 0 top
H131  MOUNT-HOLE2.8  [2,8]  326.79,317.34 0 top
H132  MOUNT-HOLE2.8  [2,8]  389.79,317.34 0 top
H133  MOUNT-HOLE2.8  [2,8]  389.79,347.34 0 top
H134  MOUNT-HOLE2.8  [2,8]  326.79,404.34 0 top
H135  MOUNT-HOLE2.8  [2,8]  389.79,404.34 0 top
H136  MOUNT-HOLE2.8  [2,8]  326.79,411.34 0 top
H137  MOUNT-HOLE2.8  [2,8]  389.79,411.34 0 top
H138  MOUNT-HOLE2.8  [2,8]  389.79,441.34 0 top
H139  MOUNT-HOLE2.8  [2,8]  326.79,448.34 0 top
H140  MOUNT-HOLE2.8  [2,8]  389.79,448.34 0 top
H141  MOUNT-HOLE2.8  [2,8]  326.79,223.34 0 top
H142  MOUNT-HOLE2.8  [2,8]  389.79,223.34 0 top
H143  MOUNT-HOLE2.8  [2,8]  389.79,253.34 0 top
H144  MOUNT-HOLE2.8  [2,8]  326.79,310.34 0 top
H145  MOUNT-HOLE2.8  [2,8]  389.79,310.34 0 top
H146  MOUNT-HOLE2.8  [2,8]  389.79,65.34 0 top
H147  MOUNT-HOLE2.8  [2,8]  326.79,122.34 0 top
H148  MOUNT-HOLE2.8  [2,8]  389.79,122.34 0 top
H149  MOUNT-HOLE2.8  [2,8]  326.79,66.34 180 top
H150  MOUNT-HOLE2.8  [2,8]  389.79,9.34 180 top
H151  MOUNT-HOLE2.8  [2,8]  326.79,9.34 180 top
H152  MOUNT-HOLE2.8  [2,8]  326.79,129.34 0 top
H153  MOUNT-HOLE2.8  [2,8]  389.79,129.34 0 top
H154  MOUNT-HOLE2.8  [2,8]  389.79,159.34 0 top
H155  MOUNT-HOLE2.8  [2,8]  326.79,216.34 0 top
H156  MOUNT-HOLE2.8  [2,8]  389.79,216.34 0 top
H157  MOUNT-HOLE2.8  [2,8]  397.86,384.34 270 top
H161  MOUNT-HOLE2.8  [2,8]  454.86,447.34 270 top
H162  MOUNT-HOLE2.8  [2,8]  454.86,384.34 270 top
H163  MOUNT-HOLE2.8  [2,8]  397.86,313.34 270 top
H164  MOUNT-HOLE2.8  [2,8]  454.86,376.34 270 top
H165  MOUNT-HOLE2.8  [2,8]  454.86,313.34 270 top
H166  MOUNT-HOLE2.8  [2,8]  398.11,242.34 270 top
H167  MOUNT-HOLE2.8  [2,8]  455.11,305.34 270 top
H168  MOUNT-HOLE2.8  [2,8]  455.11,242.34 270 top
H169  MOUNT-HOLE2.8  [2,8]  398.09,171.26 270 top
H170  MOUNT-HOLE2.8  [2,8]  455.09,234.26 270 top
H171  MOUNT-HOLE2.8  [2,8]  455.09,171.26 270 top
H172  MOUNT-HOLE2.8  [2,8]  398.09,100.26 270 top
H173  MOUNT-HOLE2.8  [2,8]  455.09,163.26 270 top
H174  MOUNT-HOLE2.8  [2,8]  455.09,100.26 270 top
H175  MOUNT-HOLE2.8  [2,8]  398.09,29.26 270 top
H176  MOUNT-HOLE2.8  [2,8]  455.09,92.26 270 top
H177  MOUNT-HOLE2.8  [2,8]  455.09,29.26 270 top
H178  MOUNT-HOLE2.8  [2,8]  78.81,518.34 90 top
H179  MOUNT-HOLE2.8  [2,8]  48.81,518.34 90 top
H180  MOUNT-HOLE2.8  [2,8]  41.81,455.34 90 top
H181  MOUNT-HOLE2.8  [2,8]  41.81,518.34 90 top
H182  MOUNT-HOLE2.8  [2,8]  266.81,455.34 90 top
H183  MOUNT-HOLE2.8  [2,8]  266.81,518.34 90 top
H184  MOUNT-HOLE2.8  [2,8]  236.81,518.34 90 top
H185  MOUNT-HOLE2.8  [2,8]  179.81,455.34 90 top
H186  MOUNT-HOLE2.8  [2,8]  179.81,518.34 90 top
H187  MOUNT-HOLE2.8  [2,8]  360.81,455.34 90 top
H188  MOUNT-HOLE2.8  [2,8]  360.81,518.34 90 top
H189  MOUNT-HOLE2.8  [2,8]  330.81,518.34 90 top
H190  MOUNT-HOLE2.8  [2,8]  273.81,455.34 90 top
H191  MOUNT-HOLE2.8  [2,8]  273.81,518.34 90 top
H192  MOUNT-HOLE2.8  [2,8]  172.81,526.34 90 top
H193  MOUNT-HOLE2.8  [2,8]  172.81,589.34 90 top
H194  MOUNT-HOLE2.8  [2,8]  142.81,589.34 90 top
H195  MOUNT-HOLE2.8  [2,8]  85.81,526.34 90 top
H196  MOUNT-HOLE2.8  [2,8]  85.81,589.34 90 top
H197  MOUNT-HOLE2.8  [2,8]  78.81,526.34 90 top
H198  MOUNT-HOLE2.8  [2,8]  78.81,589.34 90 top
H199  MOUNT-HOLE2.8  [2,8]  48.81,589.34 90 top
H200  MOUNT-HOLE2.8  [2,8]  41.81,526.34 90 top
H201  MOUNT-HOLE2.8  [2,8]  41.81,589.34 90 top
H202  MOUNT-HOLE2.8  [2,8]  266.81,526.34 90 top
H203  MOUNT-HOLE2.8  [2,8]  266.81,589.34 90 top
H204  MOUNT-HOLE2.8  [2,8]  236.81,589.34 90 top
H205  MOUNT-HOLE2.8  [2,8]  179.81,526.34 90 top
H206  MOUNT-HOLE2.8  [2,8]  179.81,589.34 90 top
H207  MOUNT-HOLE2.8  [2,8]  360.81,526.34 90 top
H208  MOUNT-HOLE2.8  [2,8]  360.81,589.34 90 top
H209  MOUNT-HOLE2.8  [2,8]  330.81,589.34 90 top
H210  MOUNT-HOLE2.8  [2,8]  273.81,526.34 90 top
H211  MOUNT-HOLE2.8  [2,8]  273.81,589.34 90 top
H212  MOUNT-HOLE2.8  [2,8]  172.81,597.34 90 top
H213  MOUNT-HOLE2.8  [2,8]  172.81,660.34 90 top
H214  MOUNT-HOLE2.8  [2,8]  142.81,660.34 90 top
H215  MOUNT-HOLE2.8  [2,8]  85.81,597.34 90 top
H216  MOUNT-HOLE2.8  [2,8]  85.81,660.34 90 top
H217  MOUNT-HOLE2.8  [2,8]  78.81,597.34 90 top
H218  MOUNT-HOLE2.8  [2,8]  78.81,660.34 90 top
H219  MOUNT-HOLE2.8  [2,8]  48.81,660.34 90 top
H220  MOUNT-HOLE2.8  [2,8]  41.81,597.34 90 top
H221  MOUNT-HOLE2.8  [2,8]  41.81,660.34 90 top
H222  MOUNT-HOLE2.8  [2,8]  266.81,597.34 90 top
H223  MOUNT-HOLE2.8  [2,8]  266.81,660.34 90 top
H224  MOUNT-HOLE2.8  [2,8]  236.81,660.34 90 top
H225  MOUNT-HOLE2.8  [2,8]  179.81,597.34 90 top
H226  MOUNT-HOLE2.8  [2,8]  179.81,660.34 90 top
H227  MOUNT-HOLE2.8  [2,8]  360.81,597.34 90 top
H228  MOUNT-HOLE2.8  [2,8]  360.81,660.34 90 top
H229  MOUNT-HOLE2.8  [2,8]  330.81,660.34 90 top
H230  MOUNT-HOLE2.8  [2,8]  273.81,597.34 90 top
H231  MOUNT-HOLE2.8  [2,8]  273.81,660.34 90 top

## Library data of the parts
H16-H26 H32-H157 H161-H231 = holes

## Text on the board
Dimension: 1" square / reference